# Altium PCB VVBlock.PcbDoc
Units mil, origin at the board's own origin, x right, y up, seen from the top; angles counter-clockwise.
Board outline 2400 x 1600 mil, 2 copper layers (Top Layer, Bottom Layer); 17 components, 17 nets, 62 pads, 2 vias.
Unrouted connection lines stored in the file: 2.
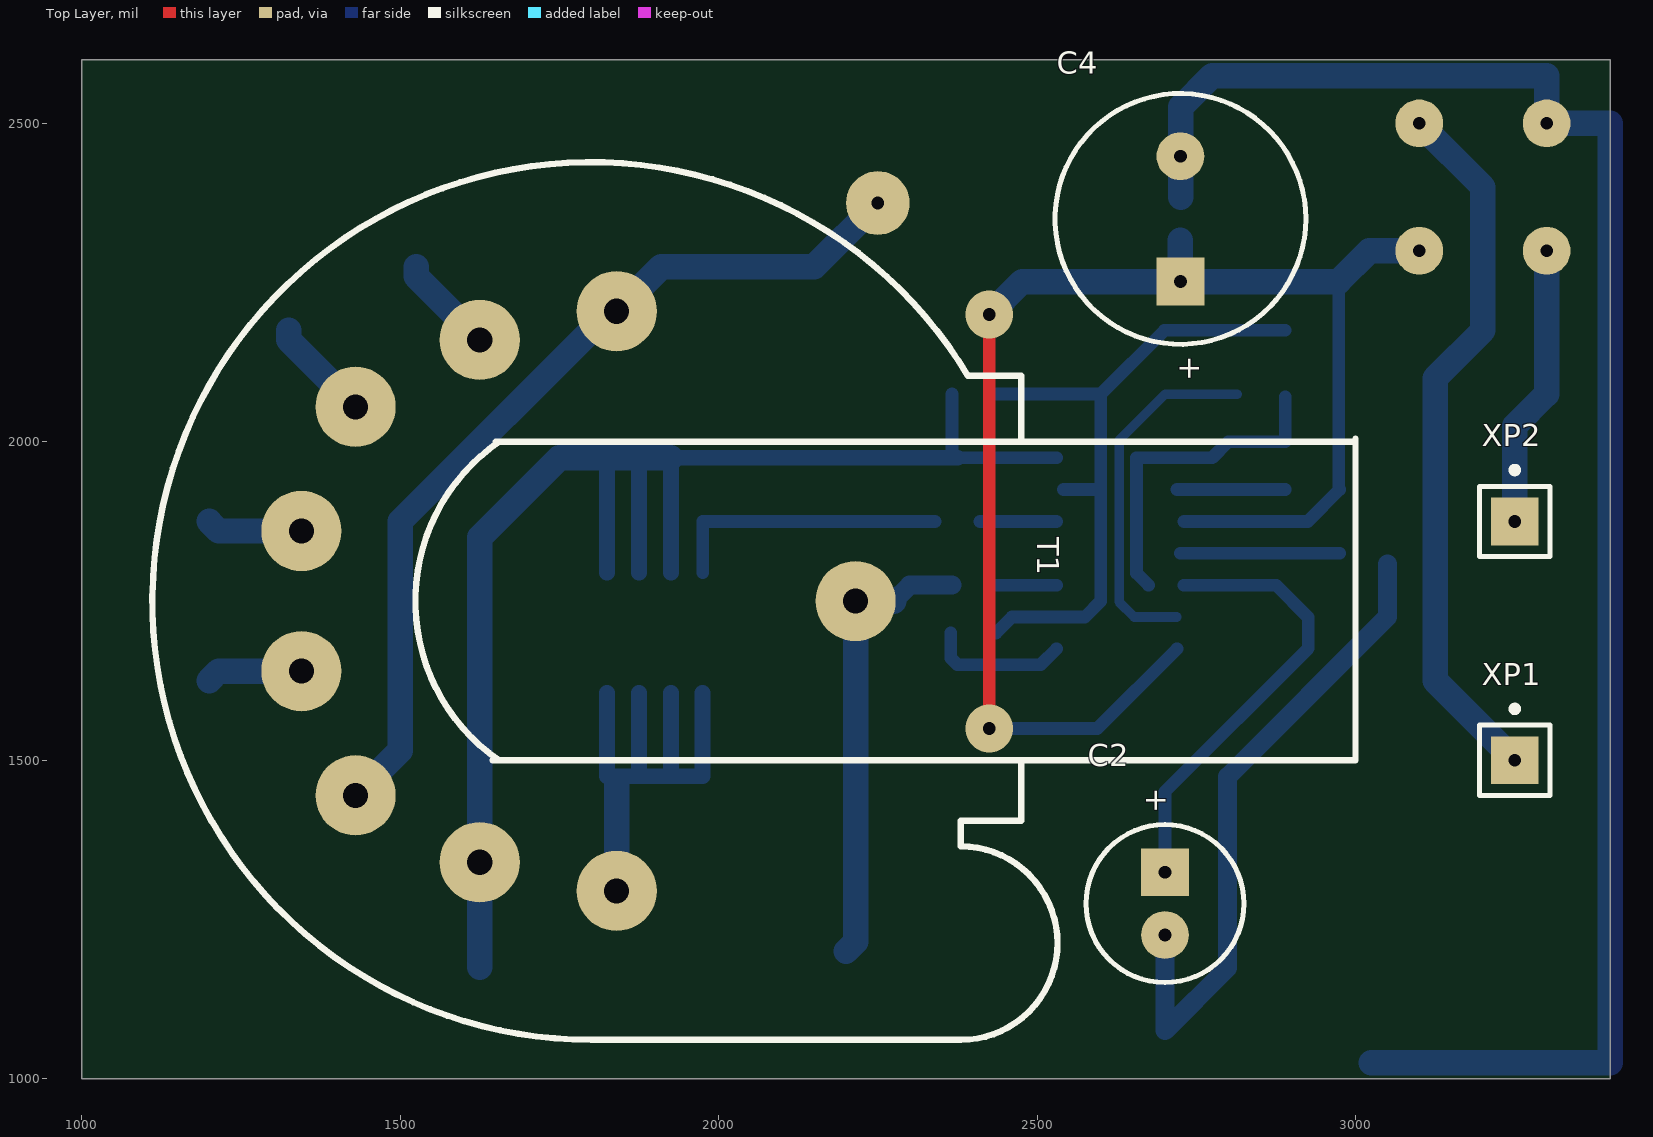
[diagram p0: Top Layer view]
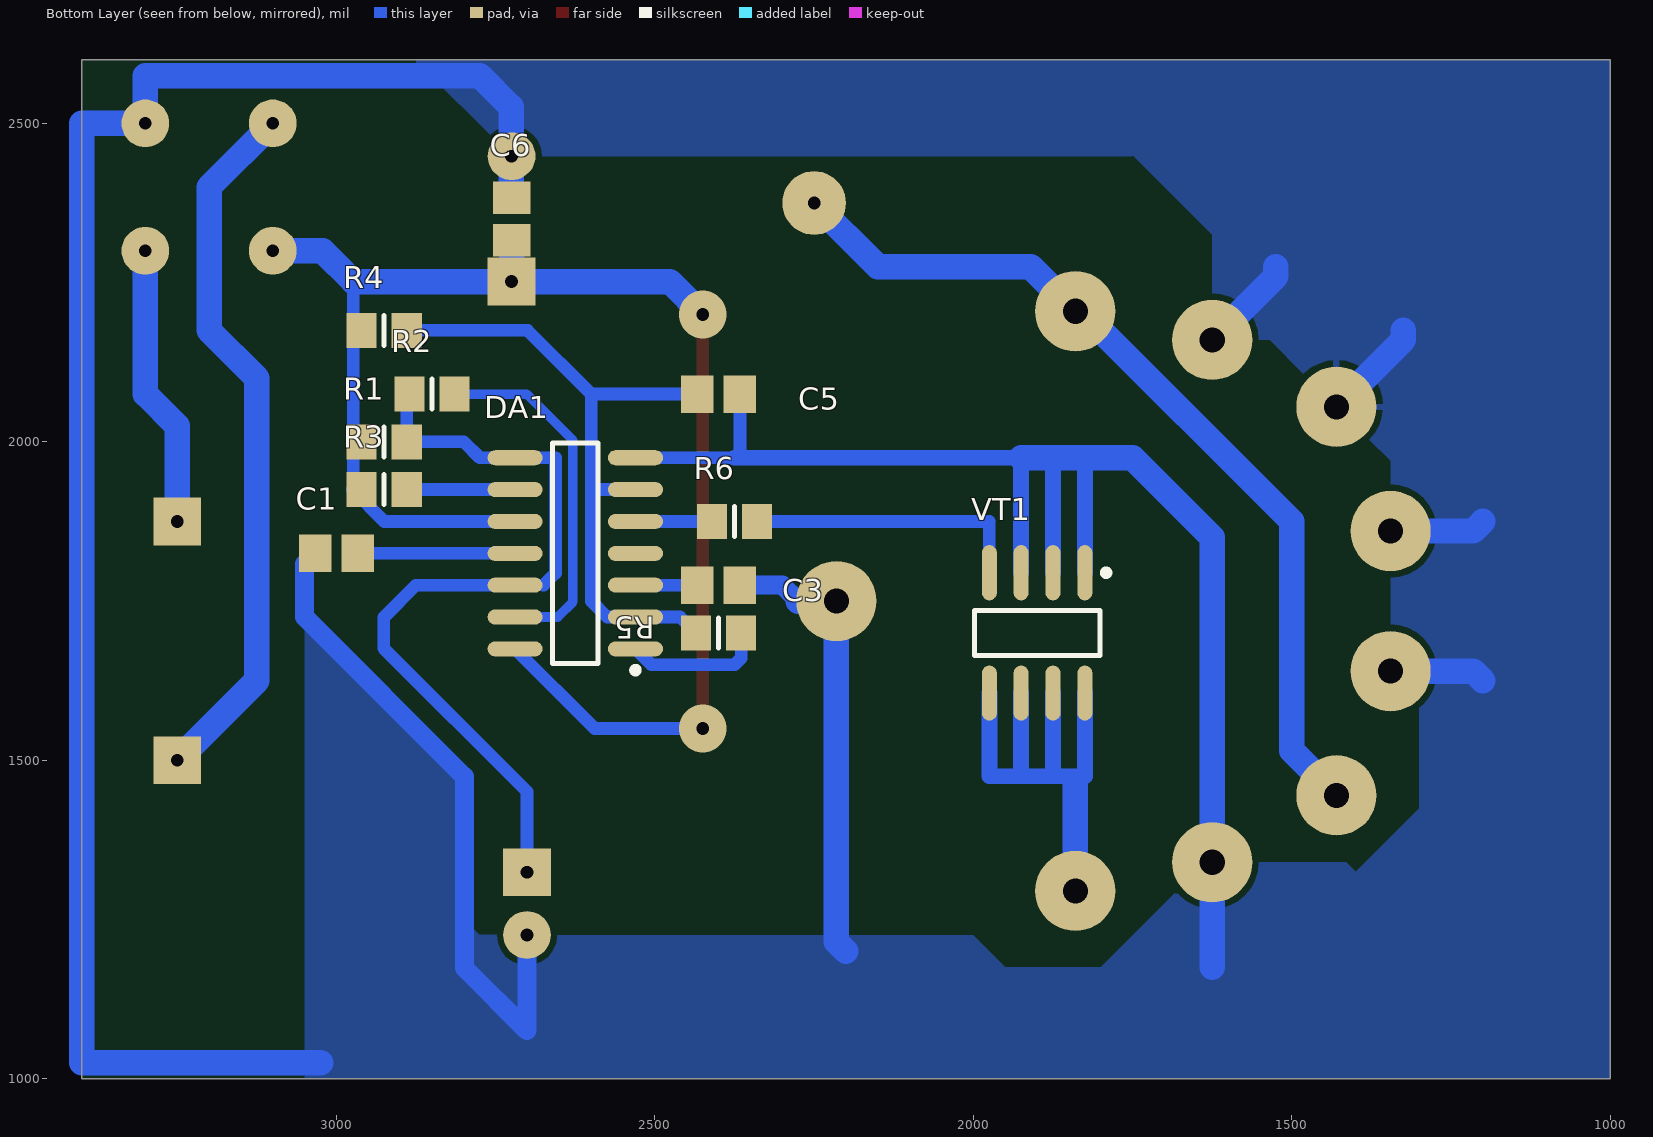
[diagram p1: Bottom Layer view, seen from below]

## Layer stack, top to bottom
Top Layer: signal copper 1.4
Dielectric: dielectric 12.6, FR-4, Dk 4.8
Bottom Layer: signal copper 1.4

## Board outline
1000,1000 3400,1000 3400,2600 1000,2600

## Design rules (kind name [scope] priority, off if disabled: settings)
Clearance [All] p1: gap=10
PolygonConnect [All] p1: connectstyle=Relief reliefconductorwidth=10 reliefentries=4 polygonreliefangle="90 Angle" airgapwidth=10
RoomDefinition VVblock [InComponentClass('VVblock')] p1: confinementstyle=ConfineIn formatcopy=TRUE lockcomponents=FALSE outline 1000,1008.46 3400,1008.46 3400,2600 1000,2600
RoutingLayers [OnLayer('Bottom Layer')] p1: top layer_v5=FALSE bottom layer_v5=TRUE
RoutingVias [All] p1: holewidth=28 width=50 viastyle="Through Hole" minholewidth=28 minwidth=50 maxholewidth=28 maxwidth=50
SolderMaskExpansion [All] p1: expansion=4
Width [All] p1: maxlimit=40 minlimit=15 preferedwidth=30
27 further rules are at their usual default settings.

## Components (designator, comment, footprint, x,y, rotation, side; value= is the part's Value field where it differs from the comment)
C1 "Cap" CAPC2012N 3000,1825 r180 bottom
C2 "Cap Pol1" CAPPR2.5-6.3X11 2700.79,1275 r270 top
C3 "Cap" CAPC2012N 2400,1775 r0 bottom
C4 "Cap Pol1" CAPPR5-10X20 2725,2350 r90 top
C5 "Cap" CAPC2012N 2400,2075 r0 bottom
C6 "Cap" CAPC2012N 2725,2350 r270 bottom
DA1 "SA556D" SO14_N 2625,1825 r0 bottom
R1 "Res2" RESC2012N 2925,2000 r0 bottom
R2 "Res2" RESC2012N 2850,2075 r0 bottom
R3 "Res2" RESC2012N 2925,1925 r0 bottom
R4 "Res2" RESC2012N 2925,2175 r0 bottom
R5 "Res2" RESC2012N 2400,1700 r0 bottom
R6 "Res2" RESC2012N 2375,1875 r0 bottom
T1 "BSH08" TRF_4 1800,1750 r270 top
VT1 "IRF7470" SO-8_N 1900,1700 r270 bottom
XP1 "~12V" PIN1 3250,1500 r0 top
XP2 "~12V" PIN1 3250,1875 r0 top

## Footprints (in the part's own frame and the unit in brackets; to place one, negate y for a bottom-side part, rotate by r counter-clockwise, add the part's x,y. Pads: shape width x height; smd on the part's side, far side on the other; paste and mask are expansions set on the pad)
CAPC2012N [mm] "Chip Capacitor, Body 2.0x1.3mm, IPC Medium Density"
  rect 1.3x1.5 smd: 1(-0.85,0) 2(0.85,0)
  body extent -1.1,-0.72 1.1,0.72, height 1.1
CAPPR2.5-6.3X11 [mil] "Capacitor, Electrolytic, Radial; Body 6.3 x 11 mm (Dia.xH typ); Pin Spacing 2.5 mm (typ)"
  rect 75x75 hole 20: 1(-49.21,0)
  round 75 hole 20: 2(49.21,0)
  silkscreen extent -124,-124 124,124
CAPPR5-10X20 [mil] "Capacitor, Electrolytic, Radial; Body 10 x 20 mm (Dia.xH typ); Pin Spacing 5 mm (typ)"
  rect 75x75 hole 20: 1(-98.43,0)
  round 75 hole 20: 2(98.43,0)
  silkscreen extent -197,-197 197,197
PIN1 [mil] "Connector; Plug"
  rect 75x75 hole 20: 1(0,0)
  silkscreen extent -55,-55 55,86
RESC2012N [mm] "Chip Resistor, Body 2.0x1.3mm, IPC Medium Density"
  rect 1.2x1.4 smd: 1(-0.9,0) 2(0.9,0)
  silkscreen extent 0,-0.6 0,0.6, body extent -1.07,-0.7 1.07,0.7, height 0.65
SO14_N [mm] "SOIC, 14-Leads, Body 8.7x3.9mm, Pitch 1.27mm, IPC Medium Density"
  oval 2.2x0.6 smd: 1(-2.4,3.81) 2(-2.4,2.54) 3(-2.4,1.27) 4(-2.4,0) 5(-2.4,-1.27) 6(-2.4,-2.54) 7(-2.4,-3.81) 8(2.4,-3.81) 9(2.4,-2.54) 10(2.4,-1.27) 11(2.4,0) 12(2.4,1.27) 13(2.4,2.54) 14(2.4,3.81)
  silkscreen extent -2.52,-4.4 0.9,4.78, body extent -1.95,-4.33 1.95,4.33, height 1.75
SO-8_N [mm] "SOIC, 8-Leads, Body 4.9x3.9mm, Pitch 1.27mm, IPC Medium Density"
  oval 2.2x0.6 smd: 1(-2.4,1.905) 2(-2.4,0.635) 3(-2.4,-0.635) 4(-2.4,-1.905) 5(2.4,-1.905) 6(2.4,-0.635) 7(2.4,0.635) 8(2.4,1.905)
  silkscreen extent -2.52,-2.5 0.9,2.88, body extent -2,-2.5 2,2.5, height 1.75
TRF_4 [mm] "Transformer; 4 Leads"
  round 3.2 hole 1: 1(-11.557,1.016) 2(-10.414,-4.445) 3(-7.747,-9.398) 4(-2.794,-11.557) 5(2.794,-11.557) 6(7.747,-9.398) 7(10.414,-4.445) 8(11.557,1.016) 9(0,10.541)
  silkscreen extent -17.5,-17.5 17.5,30.48

## Part data
C1 C3 C5 C6: "Capacitor"
C2 C4: "Polarized Capacitor (Radial)"
DA1: "General-Purpose Dual Bipolar Timer"
R1 R2 R3 R4 R5 R6: "Resistor"
T1: library part "Trans Cupl", "Transformer (Coupled Inductor Model)"
VT1: library part IRF7474, "HEXFET Power MOSFET"
XP1 XP2: library part Plug, "Plug"

## Free pads (board coordinates)
  round 100 hole 20: 0(2250,2375)
  round 75 hole 20: 0(3100,2300) 0(3100,2500) 0(3300,2300) 0(3300,2500)

## Via types
v1: diameter 75, hole 20, Top Layer to Bottom Layer, 2 vias

## Nets (pads, with @x,y where several pads share a name; then routed paths per layer and width w, separated by ;. In a path a pad name is that pad's centre, name@x,y a point inside that pad or via, vN(x,y) a via of type N, cw(c..) or ccw(c..) an arc to the next point about the centre after c; other vN are vias at no path point)
DISCH1: DA1.13 R2.1 | length 570.3
  Bottom Layer w15: DA1.13 2652.5,1725 2628.68,1748.82 2628.68,2002.5 2701.18,2075 R2.1
DISCH2: DA1.1 R5.1 | length 220.2
  Bottom Layer w20: R5.1 2364.57,1660.43 2375,1650 2505.51,1650 DA1.1
GND: C1.1 C2.2 C3.1 C4.2 C5.1 C6.1 DA1.7 pad.0@3300,2500 T1.2 T1.3 T1.4 T1.5 T1.7 T1.9 VT1.1 VT1.2 VT1.3 | length 7416.2
  Bottom Layer w20: C5.1 2366.54,1983.46 2375,1975 DA1.7
  Bottom Layer w25: VT1.1 1825,1975 ; VT1.2 1875,1975 ; VT1.3 1925,1975 2375,1975
  Bottom Layer w30: T1.9@2275,1750 2300,1775 C3.1 ; C2.2 2700.79,1075.79 2799.21,1174.21 2799.21,1474.21 3050,1725 C1.1@3050,1808.46
  Bottom Layer w40: 1200,1625 1215,1640 T1.5 ; 1200,1875 1215,1860 T1.4 ; 1325,2175 1325,2160 T1.3 ; 1525,2275 1525,2260 T1.2 T1.2@1625,2150 ; 1625,1175 T1.7 1625,1850 1750,1975 1825,1975 1875,1975 1925,1975 ; 2200,1200 2215,1215 T1.9 T1.9@2275,1750 ; C6.1@2725.79,2384.25 2725.79,2525.79 2775,2575 3300,2575 3300,2500 3400,2500 3400,1025 3025,1025
NetC1_2: C1.2 DA1.11 | length 250
  Bottom Layer w20: DA1.11@2725,1825 C1.2@2975,1825
NetC3_2: C3.2 DA1.3 | length 97
  Bottom Layer w20: C3.2 DA1.3
NetC7_2: T1.8 VT1.5 VT1.6 VT1.7 VT1.8 | length 842
  Bottom Layer w25: VT1.8 1825,1475 1875,1475 ; VT1.7 1875,1475 ; VT1.6 1925,1475 ; VT1.5 1975,1475 1925,1475 ; 1875,1475 1925,1475
  Bottom Layer w40: T1.8 1840,1465
NetDA1_5: DA1.5 R6.2 | length 120.1
  Bottom Layer w20: R6.2 DA1.5
NetP1_1: 
NetR6_1: R6.1 VT1.4 | length 445.1
  Bottom Layer w20: VT1.4 1975,1875 R6.1
NetVD1_2: 
NetVD1_4: 
RESET2: DA1.4 DA1.9 R3.1 | length 170.1
  Bottom Layer w20: DA1.9 R3.1
TRIGER1: C2.1 DA1.8 DA1.12 R1.1 R2.2 | length 1231.9
  Bottom Layer w20: 2675,1775 2656.18,1793.82 2656.18,1975 DA1.8 2775,1975 2800,2000 R1.1 R2.2@2889.57,2070.87 ; C2.1 2700.79,1450.79 2925.79,1675.79 2925.79,1724.21 2875,1775 DA1.12@2730.51,1775
TRIGER2: C5.2 DA1.2 DA1.6 R4.1 R5.2 | length 1066.3
  Bottom Layer w20: C5.2 2600,2075 ; R5.2 2460.43,1725 DA1.2 2575,1725 2600,1750 2600,1925 ; DA1.6@2541.54,1925 2600,1925 ; R4.1 2700,2175 2600,2075 ; 2600,1925 2600,2075
VCC: C4.1 C6.2 DA1.10 DA1.14 pad.0@2250,2375 pad.0@3100,2300 R1.2 R3.2 R4.2 T1.1 T1.6 | length 3791
  Top Layer w20: v1(2425,1550) v1(2425,2200)
  Bottom Layer w20: v1(2425,1550) 2594.49,1550 DA1.14 ; DA1.10@2730.51,1875 2925,1875 R3.2@2975,1925 ; R3.2@2973.43,1925 2973.43,2251.57
  Bottom Layer w40: T1.6 1500,1515 1500,1875 1830,2205 T1.1 1910,2275 2150,2275 pad.0@2250,2375 ; v1@2420,2205 v1(2425,2200) 2476.57,2251.57 C4.1 ; C4.1@2725,2252.36 C6.2 ; C4.1@2725.79,2251.57 2973.43,2251.57 3021.85,2300 pad.0@3100,2300
~12V1: pad.0@3100,2500 XP1.1 | length 1124.3
  Bottom Layer w40: pad.0@3100,2500 3200,2400 3200,2175 3125,2100 3125,1625 XP1.1
~12V2: pad.0@3300,2300 XP2.1 | length 445.7
  Bottom Layer w40: XP2.1 3250,2025 3300,2075 pad.0@3300,2300

## Polygon pours and split planes (outlines as drawn)
GND on Bottom Layer "Bottom Layer-No Net" (solid, pour order 4): 3050,1725 3050,1000 1000,1000 1000,2600 2875,2600 2875,2575 2851.57,2575 2725,2448.43 1751.57,2448.43 1750,2450 1625,2325 1625,2160 1535,2160 1430,2055 1345,1970 1345,1860 1345,1640 1300,1595 1300,1500 1300,1425 1400,1325 1415,1340 1625,1340 1635,1340 1800,1175 1950,1175 2000,1225 2700,1225 2700.79,1225.79 2775,1225.79 2775.79,1225.79 2799.21,1249.21 2800,1250 2800,1475 3050,1725

## Text inside footprints (layer, text, board x,y; h text height)
C2: Top Overlay "+" at 2671.26,1457.09 h35 r270
C4: Top Overlay "+" at 2754.53,2095.08 h35 r90